# Altium PCB PCB4.PcbDoc
Units mil, origin at the board's own origin, x right, y up, seen from the top; angles counter-clockwise.
Board outline 15000 x 6915 mil, 2 copper layers (Top Layer, Bottom Layer); 48 components, 138 nets, 415 pads, 0 vias.
Unrouted connection lines stored in the file: 255.
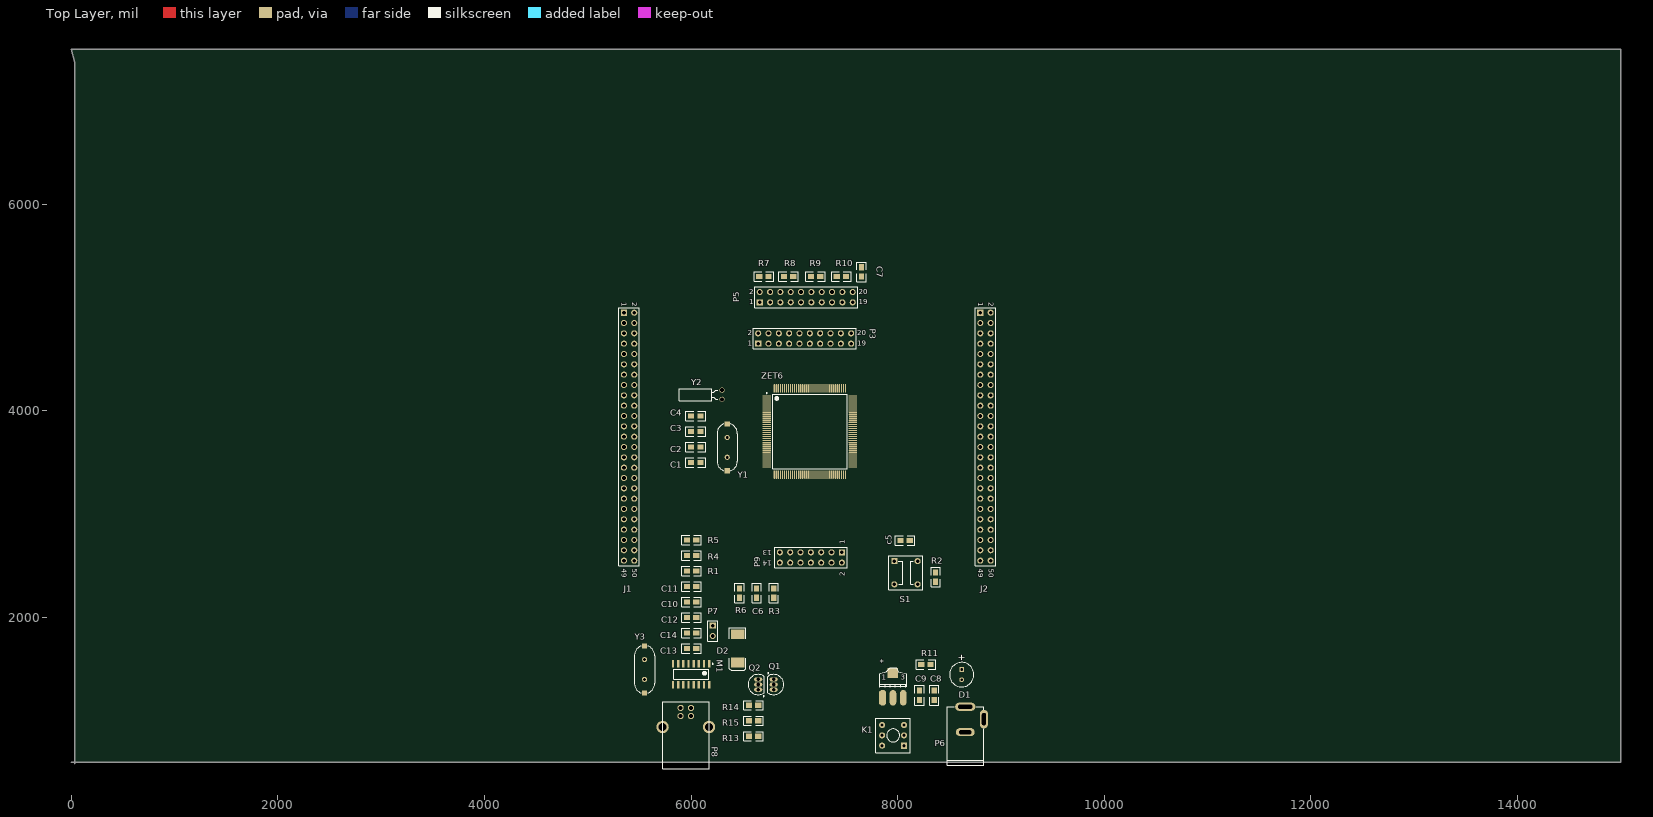
[diagram p0: Top Layer view]
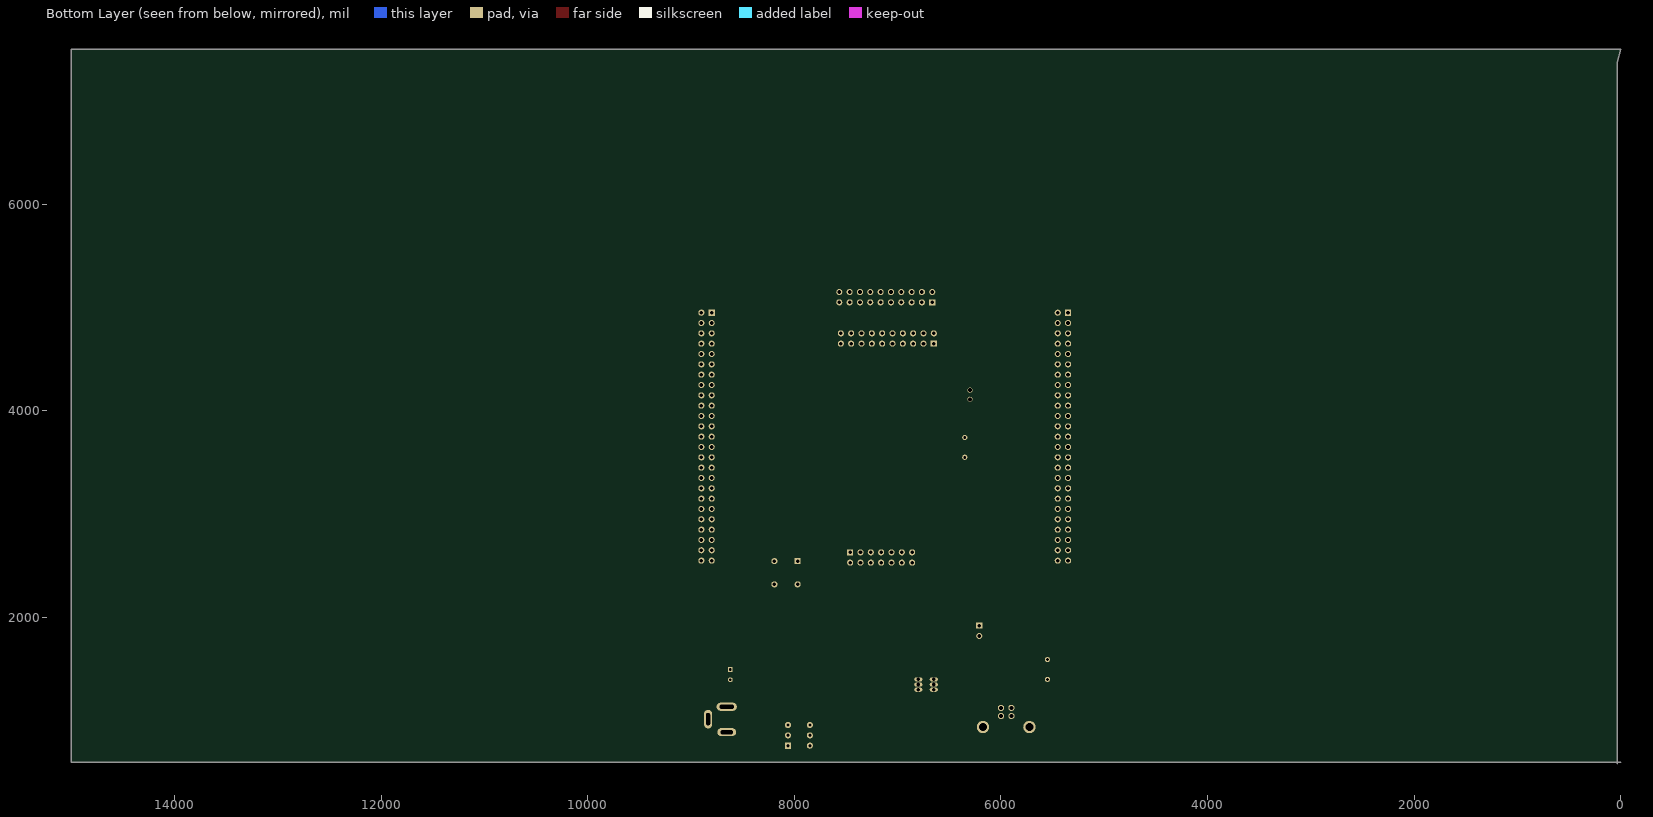
[diagram p1: Bottom Layer view, seen from below]

## Layer stack, top to bottom
Top Layer: signal copper 1.4
Dielectric: dielectric 12.6, FR-4, Dk 4.8
Bottom Layer: signal copper 1.4

## Board outline
35,7375 35,585 20,600 0,600 15000,600 15000,7500 0,7500

## Design rules (kind name [scope] priority, off if disabled: settings)
Clearance [All] p1: gap=5
PolygonConnect [All] p1: connectstyle=Relief reliefconductorwidth=10 reliefentries=4 polygonreliefangle="90 Angle" airgapwidth=10
RoutingVias [All] p1: holewidth=28 width=50 viastyle="Through Hole" minholewidth=28 minwidth=50 maxholewidth=28 maxwidth=50
SilkscreenOverComponentPads [All] p1: minsilkscreentomaskgap=10
SolderMaskExpansion [All] p1: expansion=4
Width [All] p1: maxlimit=10 minlimit=10 preferedwidth=10
27 further rules are at their usual default settings.

## Components (designator, comment, footprint, x,y, rotation, side; value= is the part's Value field where it differs from the comment)
* "ASM1117" AMS1117 7854,1222 r0 top
C1 "Cap" 0805 6000,3500 r0 top
C2 "Cap" 0805 6000,3650 r0 top
C3 "Cap" 0805 6000,3800 r0 top
C4 "Cap" 0805 6000,3950 r0 top
c5 "Cap" 0805 8118,2745 r180 top
C6 "Cap Semi" 0805 6634.94,2190 r90 top
C7 "Cap Semi" 0805 7650,5300 r90 top
C8 "Cap" 0805 8355,1201 r90 top
C9 "Cap" 0805 8212,1201 r90 top
C10 "Cap Semi" 0805 5960,2150 r0 top
C11 "Cap Semi" 0805 5960,2300 r0 top
C12 "Cap Semi" 0805 5960,2000 r0 top
C13 "Cap Semi" 0805 6050,1700 r180 top
C14 "Cap Semi" 0805 6050,1850 r180 top
D1 "LED3" RB.1 8620,1495 r90 top
D2 "Diode" SMC 6450,1700 r270 top
J1 "Edge Con 50" HDR2X25 5350,4950 r270 top
J2 "Edge Con 50" HDR2X25 8800,4950 r270 top
K1 "BUTTON" BTN8.5*8.5 8062,758 r180 top
M1 "CH340" ch340 6000,1450 r270 top
P3 "Header 10X2H" HDR2X10 6650,4650 r0 top
P5 "download" HDR2X10 6665,5050 r0 top
P6 "PWR2.5" POWER_002 8655,1135 r0 top
P7 "Header 2" HDR1X2 6210,1920 r270 top
P8 "MiNiUSB" USB_B1 5999,1124 r270 top
P9 "Header 7X2" HDR2X7 7460,2630 r180 top
Q1 "2N3904" TO-92A 6800,1350 r180 top
Q2 "2N3904" TO-92A 6650,1350 r0 top
R1 "Res2" 0805 5960,2450 r0 top
R2 "Res2" 0805 8368,2345 r90 top
R3 "Res2" 0805 6800,2280 r270 top
R4 "Res2" 0805 5960,2600 r0 top
R5 "Res2" 0805 5960,2750 r0 top
R6 "Res2" 0805 6470,2190 r90 top
R7 "Res2" 0805 6750,5300 r180 top
R8 "Res2" 0805 6900,5300 r0 top
R9 "Res2" 0805 7250,5300 r180 top
R10 "Res2" 0805 7500,5300 r180 top
R11 "Res2" 0805 8229,1544 r0 top
R13 "Res2" 0805 6650,850 r180 top
R14 "Res2" 0805 6650,1150 r180 top
R15 "Res2" 0805 6650,1000 r180 top
S1 "SW-PB" key4 7968,2545 r270 top
Y1 "8MH" XTAL_US 6350,3550 r90 top
Y2 "32.76MH" XTAL4 6300,4200 r0 top
Y3 "12MHZ" XTAL_US 5550,1400 r90 top
ZET6 "MCU" LQFP144 7150,3800 r0 top

## Footprints (in the part's own frame and the unit in brackets; to place one, negate y for a bottom-side part, rotate by r counter-clockwise, add the part's x,y. Pads: shape width x height; smd on the part's side, far side on the other; paste and mask are expansions set on the pad)
0805 [mil]
  rect 60x50 smd: 1(0,-0.06) 2(90,-0.06)
  silkscreen extent -50,-45 140,45
AMS1117 [mil]
  oct 65x150 smd: 1(0.03,-0.06)
  oval 65x150 smd: 2(100.03,-0.06) 3(200.03,-0.06)
  rect 100x100 smd: 4(100.03,239.94)
  silkscreen extent -26,100 234,293
BTN8.5*8.5 [mm]
  rect 1.5x1.5 hole 0.8: 1(0,0)
  round 1.5 hole 0.8: 2(0,-2.54) 3(0,-5.08) 4(5.4,-5.08) 5(5.4,-2.54) 6(5.4,0)
  silkscreen extent -1.55,-6.79 6.95,1.71
ch340 [mm] "SOIC, 16-Leads, Body 8.6x4.0mm (max), Pitch 1.27mm, IPC Medium Density"
  rect 1.9x0.6 smd: 1(-2.575,4.445) 2(-2.575,3.175) 3(-2.575,1.905) 4(-2.575,0.635) 5(-2.575,-0.635) 6(-2.575,-1.905) 7(-2.575,-3.175) 8(-2.575,-4.445) 9(2.575,-4.445) 10(2.575,-3.175) 11(2.575,-1.905) 12(2.575,-0.635) 13(2.575,0.635) 14(2.575,1.905) 15(2.575,3.175) 16(2.575,4.445)
  silkscreen extent -2.7,-4.3 1.22,5.42, body extent -1.98,-4.28 1.97,4.28, height 1.7
HDR1X2 [mm] "Connector; Header; 2 Position"
  rect 1.5x1.5 hole 0.9: 1(0,0)
  round 1.5 hole 0.9: 2(2.54,0)
  silkscreen extent -1.27,-1.27 3.81,1.27
HDR2X7 [mm] "Connector; Header; 7x2 Position"
  rect 1.5x1.5 hole 0.9: 1(0,0)
  round 1.5 hole 0.9: 2(0,2.54) 3(2.54,0) 4(2.54,2.54) 5(5.08,0) 6(5.08,2.54) 7(7.62,0) 8(7.62,2.54) 9(10.16,0) 10(10.16,2.54) 11(12.7,0) 12(12.7,2.54) 13(15.24,0) 14(15.24,2.54)
  silkscreen extent -1.27,-1.27 16.51,3.81
HDR2X10 [mm] "Connector; Header; 10x2 Position"
  rect 1.5x1.5 hole 0.9: 1(0,0)
  round 1.5 hole 0.9: 2(0,2.54) 3(2.54,0) 4(2.54,2.54) 5(5.08,0) 6(5.08,2.54) 7(7.62,0) 8(7.62,2.54) 9(10.16,0) 10(10.16,2.54) 11(12.7,0) 12(12.7,2.54) 13(15.24,0) 14(15.24,2.54) 15(17.78,0) 16(17.78,2.54) 17(20.32,0) 18(20.32,2.54) 19(22.86,0) 20(22.86,2.54)
  silkscreen extent -1.27,-1.27 24.13,3.81
HDR2X25 [mm] "Connector; Header; 25x2 Position"
  rect 1.5x1.5 hole 0.9: 1(0,0)
  round 1.5 hole 0.9: 2(0,2.54) 3(2.54,0) 4(2.54,2.54) 5(5.08,0) 6(5.08,2.54) 7(7.62,0) 8(7.62,2.54) 9(10.16,0) 10(10.16,2.54) 11(12.7,0) 12(12.7,2.54) 13(15.24,0) 14(15.24,2.54) 15(17.78,0) 16(17.78,2.54) 17(20.32,0) 18(20.32,2.54) 19(22.86,0) 20(22.86,2.54) 21(25.4,0) 22(25.4,2.54) 23(27.94,0) 24(27.94,2.54) 25(30.48,0) 26(30.48,2.54) 27(33.02,0) 28(33.02,2.54) 29(35.56,0) 30(35.56,2.54) 31(38.1,0) 32(38.1,2.54) 33(40.64,0) 34(40.64,2.54) 35(43.18,0) 36(43.18,2.54) 37(45.72,0) 38(45.72,2.54) 39(48.26,0) 40(48.26,2.54) 41(50.8,0) 42(50.8,2.54) 43(53.34,0) 44(53.34,2.54) 45(55.88,0) 46(55.88,2.54) 47(58.42,0) 48(58.42,2.54) 49(60.96,0) 50(60.96,2.54)
  silkscreen extent -1.27,-1.27 62.23,3.81
key4 [mm]
  round 1.5 hole 0.9: 1(0,5.715) 3(5.715,0) 4(5.715,5.715)
  rect 1.5x1.5 hole 0.9: 2(0,0)
  silkscreen extent -1.37,-1.35 7.09,7.04
LQFP144 [mm] "144-Pin Thin Quad Flat Pack 0.5 mm Pitch, IPC Low Density"
  oval 2.1x0.3 smd: 1(-10.6,8.75) 2(-10.6,8.25) 3(-10.6,7.75) 4(-10.6,7.25) 5(-10.6,6.75) 6(-10.6,6.25) 7(-10.6,5.75) 8(-10.6,5.25) 9(-10.6,4.75) 10(-10.6,4.25) 11(-10.6,3.75) 12(-10.6,3.25) 13(-10.6,2.75) 14(-10.6,2.25) 15(-10.6,1.75) 16(-10.6,1.25) 17(-10.6,0.75) 18(-10.6,0.25) 19(-10.6,-0.25) 20(-10.6,-0.75) 21(-10.6,-1.25) 22(-10.6,-1.75) 23(-10.6,-2.25) 24(-10.6,-2.75) 25(-10.6,-3.25) 26(-10.6,-3.75) 27(-10.6,-4.25) 28(-10.6,-4.75) 29(-10.6,-5.25) 30(-10.6,-5.75) 31(-10.6,-6.25) 32(-10.6,-6.75) 33(-10.6,-7.25) 34(-10.6,-7.75) 35(-10.6,-8.25) 36(-10.6,-8.75) 73(10.6,-8.75) 74(10.6,-8.25) 75(10.6,-7.75) 76(10.6,-7.25) 77(10.6,-6.75) 78(10.6,-6.25) 79(10.6,-5.75) 80(10.6,-5.25) 81(10.6,-4.75) 82(10.6,-4.25) 83(10.6,-3.75) 84(10.6,-3.25) 85(10.6,-2.75) 86(10.6,-2.25) 87(10.6,-1.75) 88(10.6,-1.25) 89(10.6,-0.75) 90(10.6,-0.25) 91(10.6,0.25) 92(10.6,0.75) 93(10.6,1.25) 94(10.6,1.75) 95(10.6,2.25) 96(10.6,2.75) 97(10.6,3.25) 98(10.6,3.75) 99(10.6,4.25) 100(10.6,4.75) 101(10.6,5.25) 102(10.6,5.75) 103(10.6,6.25) 104(10.6,6.75) 105(10.6,7.25) 106(10.6,7.75) 107(10.6,8.25) 108(10.6,8.75)
  oval 0.3x2.1 smd: 37(-8.75,-10.6) 38(-8.25,-10.6) 39(-7.75,-10.6) 40(-7.25,-10.6) 41(-6.75,-10.6) 42(-6.25,-10.6) 43(-5.75,-10.6) 44(-5.25,-10.6) 45(-4.75,-10.6) 46(-4.25,-10.6) 47(-3.75,-10.6) 48(-3.25,-10.6) 49(-2.75,-10.6) 50(-2.25,-10.6) 51(-1.75,-10.6) 52(-1.25,-10.6) 53(-0.75,-10.6) 54(-0.25,-10.6) 55(0.25,-10.6) 56(0.75,-10.6) 57(1.25,-10.6) 58(1.75,-10.6) 59(2.25,-10.6) 60(2.75,-10.6) 61(3.25,-10.6) 62(3.75,-10.6) 63(4.25,-10.6) 64(4.75,-10.6) 65(5.25,-10.6) 66(5.75,-10.6) 67(6.25,-10.6) 68(6.75,-10.6) 69(7.25,-10.6) 70(7.75,-10.6) 71(8.25,-10.6) 72(8.75,-10.6) 109(8.75,10.6) 110(8.25,10.6) 111(7.75,10.6) 112(7.25,10.6) 113(6.75,10.6) 114(6.25,10.6) 115(5.75,10.6) 116(5.25,10.6) 117(4.75,10.6) 118(4.25,10.6) 119(3.75,10.6) 120(3.25,10.6) 121(2.75,10.6) 122(2.25,10.6) 123(1.75,10.6) 124(1.25,10.6) 125(0.75,10.6) 126(0.25,10.6) 127(-0.25,10.6) 128(-0.75,10.6) 129(-1.25,10.6) 130(-1.75,10.6) 131(-2.25,10.6) 132(-2.75,10.6) 133(-3.25,10.6) 134(-3.75,10.6) 135(-4.25,10.6) 136(-4.75,10.6) 137(-5.25,10.6) 138(-5.75,10.6) 139(-6.25,10.6) 140(-6.75,10.6) 141(-7.25,10.6) 142(-7.75,10.6) 143(-8.25,10.6) 144(-8.75,10.6)
  silkscreen extent -10.72,-9.15 9.15,9.57, body extent -10,-10 10,10, height 1.6
POWER_002 [mm]
  oval 5x2 hole 1 slot 3.5 at 0 deg: 1(0,0)
  oval 4.6x2 hole 1 slot 3 at 0 deg: 2(0,-6.25)
  oval 2x4.6 hole 1 slot 3 at 90 deg: 3(4.572,-3.048)
  silkscreen extent -4.5,-14.4 4.5,0, body extent -4.76,-13.66 4.75,0.17, height 11.02
RB.1 [mm]
  rect 1.2x1.2 hole 0.7: 1(0.001,-0.007)
  round 1.2 hole 0.7: 2(-2.499,-0.007)
  silkscreen extent -4.25,-3.01 1.75,2.99
SMC [mm] "DO-214-AB/SMC; 2 C-Bend Leads; Body 7.9 x 5.9 mm, inc. leads (LxW)"
  rect 2.4x3.3 smd: 1(-3.475,0) 2(3.475,0)
  silkscreen extent -5.07,-2.05 5.43,2.05
TO-92A [mm] "TO, Flat Index; 3 In-Line, Axial Leads; Body Dia. 4.5mm; Leads 0.51 x 0.48 mm (max)"
  oval 2x1 hole 0.9: 1(0,-1.27) 2(0,0) 3(0,1.27)
  silkscreen extent -2.48,-2.95 1.5,2.48, body extent -2.5,-2.5 1.5,2.5, height 6.86
USB_B1 [mil] "USB方?"
  oct 60x60 hole 40: 1(0,0)
  round 60 hole 40: 2(0,-100) 3(78.74,-100) 4(78.74,0)
  round 120 hole 80: 5(185.04,175) 6(185.04,-275)
  silkscreen extent -61,-275 589,175
XTAL4 [mm]
  round 1.27 hole 1: 1(0,0) 2(0,-2.25)
  silkscreen extent -10.55,-2.61 -1.01,0.39
XTAL_US [mil]
  round 50 hole 28: 1(0,0) 2(192.13,0)
  rect 50x50 smd: ""(-130.32,0) ""(322.44,0)
  silkscreen extent -131,-98 323,98

## Part data
C1 C2 C3 C4 c5 C8 C9: "Capacitor"
C6 C7 C10 C11 C12 C13 C14: "Capacitor (Semiconductor SIM Model)"
D1: "Typical BLUE SiC LED"
D2: "Default Diode"
J1 J2: "50-Pin Edge Connector"
P3: "Header, 10-Pin, Dual row, Right Angle"
P6: "Low Voltage Power Supply Connector"
P7: "Header, 2-Pin"
P8: library part "Header 6", "Header, 6-Pin"
P9: "Header, 7-Pin, Dual row"
Q1 Q2: "NPN General Purpose Amplifier"
R1 R2 R3 R4 R5 R6 R7 R8 R9 R10 R11 R13 R14 R15: "Resistor"
S1: "Switch"
Y1 Y2 Y3: library part XTAL, "Crystal Oscillator"
ZET6: library part Component_1

## Nets (pads, with @x,y where several pads share a name; then routed paths per layer and width w, separated by ;. In a path a pad name is that pad's centre, name@x,y a point inside that pad or via, vN(x,y) a via of type N, cw(c..) or ccw(c..) an arc to the next point about the centre after c; other vN are vias at no path point)
BOOT0: R3.1 ZET6.138
BOOT1: Q1.1
NetC12_1: C12.1 M1.4
NetC13_2: C13.2 M1.8 Y3.1
NetC14_2: C14.2 M1.7 Y3.2
NetD1_1: D1.1 R11.2
NetD2_2: D2.2 Q2.3 R14.2
NetK1_1: K1.1 P6.1
NetM1_2: M1.2 P7.2
NetM1_3: M1.3 P7.1
NetM1_5: M1.5 P8.3
NetM1_6: M1.6 P8.2
NetM1_13: M1.13 R15.2
NetM1_14: M1.14 Q2.1 R13.2
NetP6_3: P6.3
NetQ1_2: Q1.2 R13.1
NetQ2_2: Q2.2 R15.1
NRST: c5.2 D2.1 P5.15 R2.1 S1.2 ZET6.25
OSC_IN: C1.2 Y1.1 ZET6.23
OSC_OUT: C2.2 Y1.2 ZET6.24
PA0: J1.32 ZET6.34
PA1: J1.33 ZET6.35
PA2: J1.34 P9.3 ZET6.36
PA3: J1.35 P9.4 ZET6.37
PA4: J1.36 ZET6.40
PA5: J1.37 ZET6.41
PA6: J1.38 ZET6.42
PA7: J1.39 ZET6.43
PA8: J2.15 ZET6.100
PA9: J2.14 P9.1 ZET6.101
PA10: J2.13 P9.2 ZET6.102
PA11: J2.12 ZET6.103
PA12: J2.11 ZET6.104
PA13: J2.10 P5.7 R9.1 ZET6.105
PA14: J2.9 P5.9 ZET6.109
PA15: J2.8 P5.5 R8.1 ZET6.110
PB0: J1.42 ZET6.46
PB1: J1.43 ZET6.47
PB2: J1.44 R1.1 ZET6.48
PB3: P3.10 P5.13 R10.1 ZET6.133
PB4: P3.7 P5.3 R7.1 ZET6.134
PB5: P3.8 ZET6.135
PB6: P3.5 ZET6.136
PB7: P3.6 ZET6.137
PB8: P3.3 ZET6.139
PB9: P3.4 ZET6.140
PB10: J2.40 P9.5 ZET6.69
PB11: J2.39 P9.6 ZET6.70
PB12: J2.38 ZET6.73
PB13: J2.37 ZET6.74
PB14: J2.36 ZET6.75
PB15: J2.35 ZET6.76
PC0: J1.20 ZET6.26
PC1: J1.21 ZET6.27
PC2: J1.30 ZET6.28
PC3: J1.31 ZET6.29
PC4: J1.40 ZET6.44
PC5: J1.41 ZET6.45
PC6: J2.19 ZET6.96
PC7: J2.18 ZET6.97
PC8: J2.17 ZET6.98
PC9: J2.16 ZET6.99
PC10: J2.7 P9.7 ZET6.111
PC11: J2.6 P9.8 ZET6.112
PC12: J2.5 P9.9 ZET6.113
PC13: J1.6 ZET6.7
PC14: C3.2 J1.7 Y2.1 ZET6.8
PC15: C4.2 J1.8 Y2.2 ZET6.9
PD0: J2.4 ZET6.114
PD1: J2.3 ZET6.115
PD2: J2.2 P9.10 ZET6.116
PD3: J2.1 ZET6.117
PD4: P3.19 ZET6.118
PD5: P3.20 ZET6.119
PD6: P3.17 ZET6.122
PD7: P3.18 ZET6.123
PD8: J2.34 ZET6.77
PD9: J2.33 ZET6.78
PD10: J2.32 ZET6.79
PD11: J2.31 ZET6.80
PD12: J2.30 ZET6.81
PD13: J2.29 ZET6.82
PD14: J2.28 ZET6.85
PD15: J2.27 ZET6.86
PE0: P3.1 ZET6.141
PE1: P3.2 ZET6.142
PE2: J1.1 ZET6.1
PE3: J1.2 ZET6.2
PE4: J1.3 ZET6.3
PE5: J1.4 ZET6.4
PE6: J1.5 ZET6.5
PE7: J2.49 ZET6.58
PE8: J2.48 ZET6.59
PE9: J2.47 ZET6.60
PE10: J2.46 ZET6.63
PE11: J2.45 ZET6.64
PE12: J2.44 ZET6.65
PE13: J2.43 ZET6.66
PE14: J2.42 ZET6.67
PE15: J2.41 ZET6.68
PF0: J1.9 ZET6.10
PF1: J1.10 ZET6.11
PF2: J1.11 ZET6.12
PF3: J1.12 ZET6.13
PF4: J1.13 ZET6.14
PF5: J1.14 ZET6.15
PF6: J1.15 ZET6.18
PF7: J1.16 ZET6.19
PF8: J1.17 ZET6.20
PF9: J1.18 ZET6.21
PF10: J1.19 ZET6.22
PF11: J1.45 ZET6.49
PF12: J1.46 ZET6.50
PF13: J1.47 ZET6.53
PF14: J1.48 ZET6.54
PF15: J1.49 ZET6.55
PG0: J1.50 ZET6.56
PG1: J2.50 ZET6.57
PG2: J2.26 ZET6.87
PG3: J2.25 ZET6.88
PG4: J2.24 ZET6.89
PG5: J2.23 ZET6.90
PG6: J2.22 ZET6.91
PG7: J2.21 ZET6.92
PG8: J2.20 ZET6.93
PG9: P3.15 ZET6.124
PG10: P3.16 ZET6.125
PG11: P3.13 ZET6.126
PG12: P3.14 ZET6.127
PG13: P3.11 ZET6.128
PG14: P3.12 ZET6.129
PG15: P3.9 ZET6.132
VCC: *.3 C9.2 C10.1 C11.1 J1.22 J1.23 J1.24 J1.25 K1.3 M1.16 P8.1 R11.1
VDD_1: *.2 *.4 C6.2 C7.2 C8.2 P5.1 P5.2 P9.11 P9.13 Q1.3 R2.2 R4.1 R5.1 R7.2 R8.2 R9.2 R10.2 R14.1 ZET6.17 ZET6.39 ZET6.52 ZET6.62 ZET6.72 ZET6.84 ZET6.95 ZET6.108 ZET6.121 ZET6.131 ZET6.144
VDDA: R5.2 ZET6.33
VREF+: R4.2 ZET6.32
VREF-: R6.1 ZET6.31
VSS_1: *.1 C1.1 C2.1 C3.1 C4.1 c5.1 C6.1 C7.1 C8.1 C9.1 C10.2 C11.2 C12.2 C13.1 C14.1 D1.2 J1.26 J1.27 J1.28 J1.29 M1.1 P5.4 P5.6 P5.8 P5.10 P5.12 P5.14 P5.16 P5.18 P5.20 P6.2 P8.4 P9.12 P9.14 R1.2 R3.2 R6.2 S1.1 ZET6.16 ZET6.30 ZET6.38 ZET6.51 ZET6.61 ZET6.71 ZET6.83 ZET6.94 ZET6.107 ZET6.120 ZET6.130 ZET6.143
pads on no net: K1.2 K1.4 K1.5 K1.6 M1.9 M1.10 M1.11 M1.12 M1.15 P5.11 P5.17 P5.19 P8.5 P8.6 S1.3 S1.4 Y1. Y3. ZET6.6 ZET6.106

## Text inside footprints (layer, text, board x,y; h text height)
*: Top Overlay "1" at 7848.03,1394.94 h50; Top Overlay "3" at 8028.03,1394.94 h50
D1: Top Overlay "+" at 8651.79,1577.73 h59.06 r90
J1: Top Overlay "50" at 5430,2470 h50 r270; Top Overlay "49" at 5330,2470 h50 r270; Top Overlay "1" at 5330,5050 h50 r270; Top Overlay "2" at 5430,5050 h50 r270
J2: Top Overlay "50" at 8880,2470 h50 r270; Top Overlay "49" at 8780,2470 h50 r270; Top Overlay "1" at 8780,5050 h50 r270; Top Overlay "2" at 8880,5050 h50 r270
P3: Top Overlay "2" at 6550,4730 h50; Top Overlay "1" at 6550,4630 h50; Top Overlay "19" at 7610,4630 h50; Top Overlay "20" at 7610,4730 h50
P5: Top Overlay "2" at 6565,5130 h50; Top Overlay "1" at 6565,5030 h50; Top Overlay "19" at 7625,5030 h50; Top Overlay "20" at 7625,5130 h50
P9: Top Overlay "13" at 6780,2650 h50 r180; Top Overlay "14" at 6780,2550 h50 r180; Top Overlay "1" at 7490,2710 h50 r90; Top Overlay "2" at 7490,2400 h50 r90